# Altium PCB Noise Toaster.PcbDoc (part 1 of 2)
Units mil, origin at the board's own origin, x right, y up, seen from the top; angles counter-clockwise.
Board outline 1500 x 4200 mil, 2 copper layers (Top Layer, Bottom Layer), stack 30.756 mil thick; 110 components, 78 nets, 318 pads, 72 vias.
Unrouted connection lines stored in the file: 64.
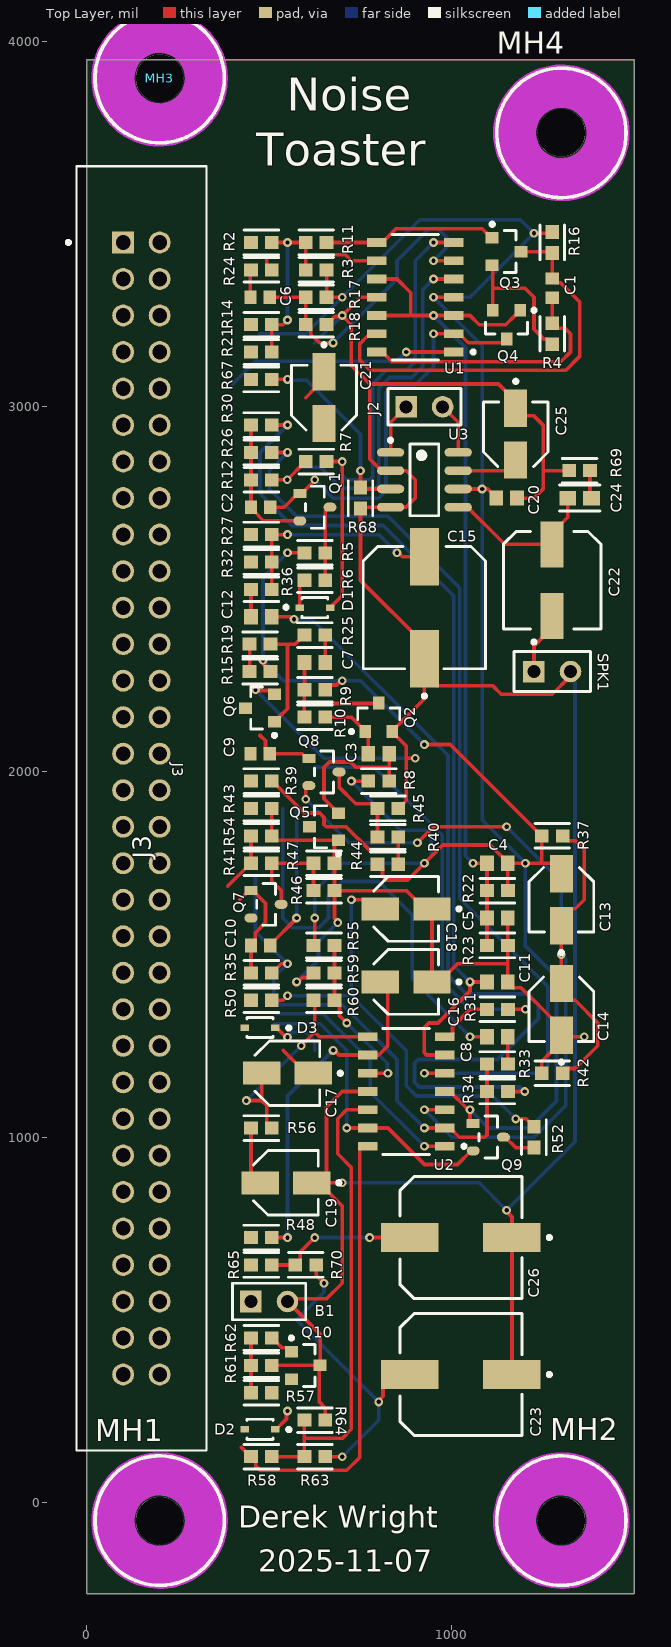
[diagram p0: Top Layer view]
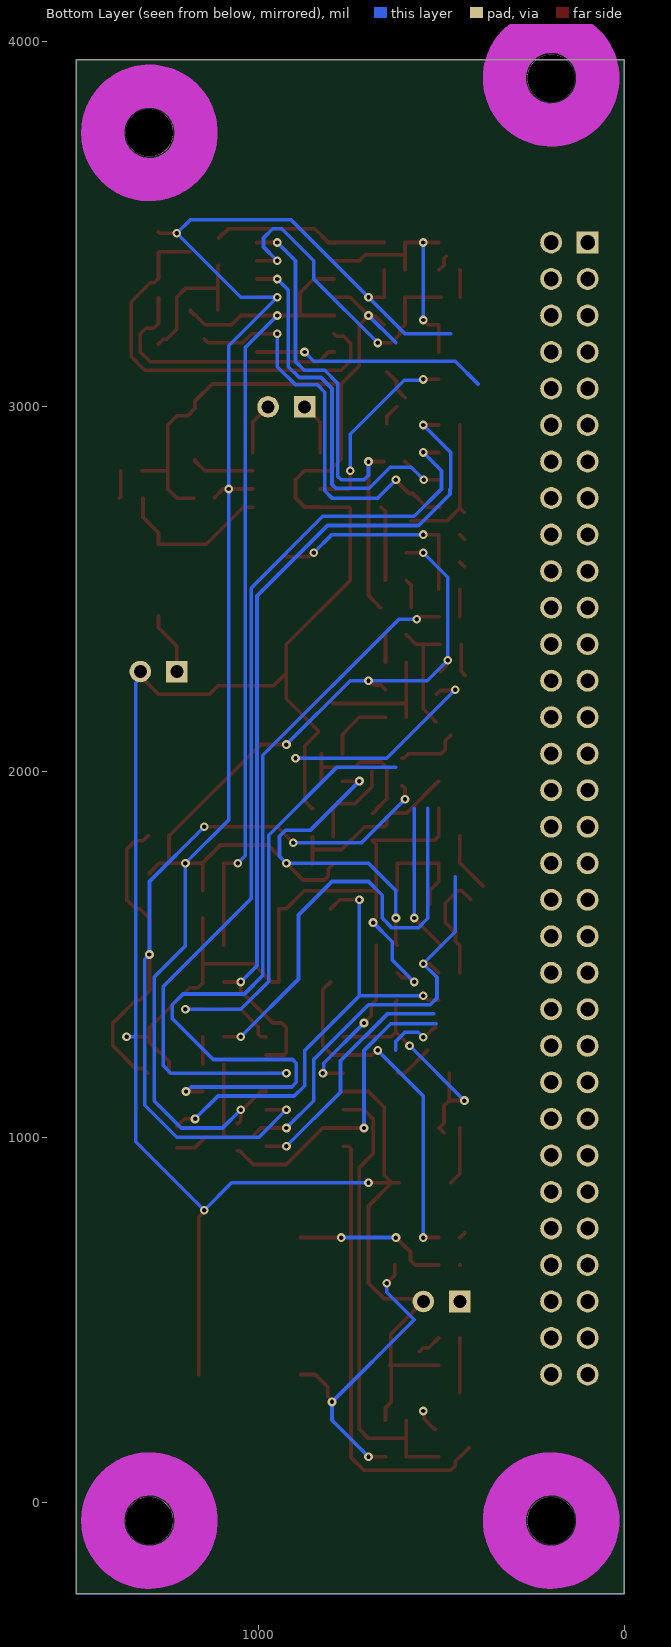
[diagram p1: Bottom Layer view, seen from below]
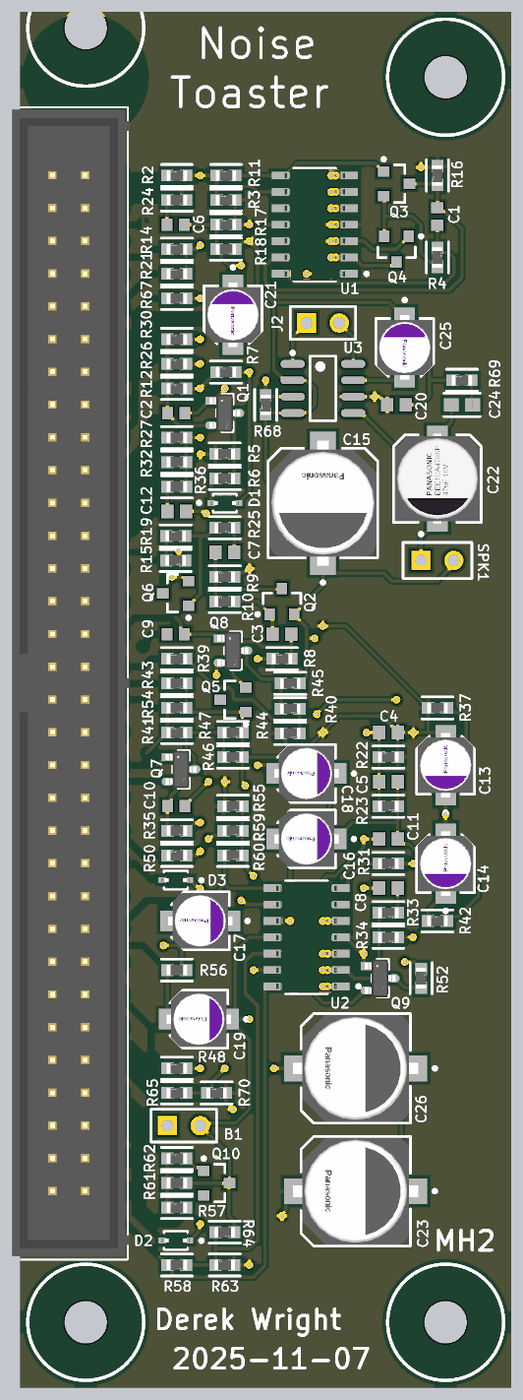
[diagram p2: 3D render of the assembled board from above, using the file's embedded part models]

## Layer stack, top to bottom
Top Solder: solder mask 1, SM-001, Dk 4
Top Layer: signal copper 1.378
Dielectric 1: core 28, Core-039, Dk 4.8
Bottom Layer: signal copper 1.378
Bottom Solder: solder mask 1, SM-001, Dk 4

## Board outline
0,-250 0,3950 1500,3950 1500,-250

## Design rules (kind name [scope] priority, off if disabled: settings)
Clearance [All] p1: gap=6 ignorepadtopadclearanceinfootprint=FALSE except(0: Arc-Hole Track-Hole SMDPad-Hole THPad-Hole Via-Hole Fill-Hole Poly-Hole Region-Hole Text-Hole; 10: SMDPad-SMDPad SMDPad-THPad SMDPad-Via SMDPad-Fill SMDPad-Poly SMDPad-Region SMDPad-Text THPad-THPad THPad-Via THPad-Fill THPad-Poly THPad-Region THPad-Text Via-Via Via-Fill Via-Poly Via-Region Via-Text Fill-Text Poly-Text Region-Text Text-Text)
HoleSize [All] p1: absolutevalues=TRUE maxlimit=200 minlimit=1 maxpercent=80.000 minpercent=20.000
MinimumSolderMaskSliver [All] p1: minsoldermaskwidth=6
PolygonConnect [All] p1: connectstyle=Relief reliefconductorwidth=10 reliefentries=4 polygonreliefangle="90 Angle" airgapwidth=10
RoutingVias [All] p1: holewidth=12 width=24 viastyle="Through Hole" minholewidth=12 minwidth=24 maxholewidth=12 maxwidth=24
SilkToSilkClearance [All] p1 off: silktosilkclearance=10
SilkToSolderMaskClearance [IsPad] p1 off: minsilkscreentomaskgap=10 clearancetoexposedcopper=TRUE
SolderMaskExpansion [All] p1: expansion=4 istentingtop=FALSE
SupplyNets "Schematic Supply Nets_2" [InNet('GND')] p1 off: voltage=0.000
SupplyNets "Schematic Supply Nets_1" [InNet('VCC')] p2: voltage=0.000
SupplyNets "Schematic Supply Nets" [InNet('VEE')] p3: voltage=0.000
Width "Schematic Width Constraint_3" [InNetClass('POWER')] p1: maxlimit=20 minlimit=10 preferedwidth=20 minimp=50.000000 maximp=50.000000 favimp=50.000000
Width [All] p2: maxlimit=20 minlimit=10 preferedwidth=10
26 further rules are at their usual default settings.

## Classes and differential pairs
component class "Noise Toaster": MH1 MH2 MH3 MH4
net class S11.[1..2]: S11.2 VCC
net class S10.[1..2]: S10.2 VCC
net class S9.[1..3]: R13.3 S7.1 S9.3
net class S8.[1..3]: S8.1 S8.2 S8.3
net class S7.[1..2]: LED1.2 S7.1
net class S6.[1..3]: R13.3 R38.3 S1.2
net class S4.[1..2]: S4.1 S4.2
net class S3.[1..3]: S3.1 S3.2 S3.3
net class S2.[1..2]: LED1.2 S2.1
net class S1.[1..2]: R20.3 S1.2
net class R66.[1..3]: R66.2 R66.3 VEE
net class R53.[1..3]: R51.1 R53.3
net class R51.[1..3]: R51.1 R51.3
net class R49.[1..3]: LED1.2 R49.3
net class R38.[1..3]: R38.1 R38.2 R38.3
net class R29.[1..3]: R28.1 R29.1
net class R28.[1..3]: GND R28.1
net class R20.[1..3]: GND R20.2 R20.3
net class R13.[1..3]: R13.2 R13.3 VEE
net class R1.[1..3]: R1.2 VCC VEE
net class LED1.[1..2]: LED1.1 LED1.2
net class J1.[1..3]: GND J1.1 J1.2
net class S5.[1..2]: R66.3 S5.2
component class "U_Front Panel Header": J3
net class POWER: GND VCC VEE
component class "U_White Noise": C3 C7 Q2 Q5 Q6 R8 R9 R10 R15 R19 R25
component class U_VCO: C1 C2 C4 C5 C6 C11 D1 Q1 Q3 Q4 R2 R3 R4 R5 R6 R7 R11 R12 R14 R16 R17 R18 R21 R22 R23 R24 R26 R30 R31 R32 U1
component class U_VCF: C8 C9 C10 C12 Q8 R27 R33 R34 R35 R36 R39 R40 R43 R44 R45 U2
component class U_VCA: Q7 R41 R46 R47
component class "U_Power Supply": B1 C13 C14 C15 C23 R37 R42
component class U_LFO: C16 C17 C19 C26 R48 R55 R56 R59 R60 R65 R70
component class "U_Audio Amplifier": C20 C21 C22 C24 C25 J2 R67 R68 R69 SPK1 U3
component class U_ADG: C18 D2 D3 Q9 Q10 R50 R52 R54 R57 R58 R61 R62 R63 R64

## Components (designator, comment, footprint, x,y, rotation, side; value= is the part's Value field where it differs from the comment)
B1 "" HDR1X2 450,550 r0 top
C1 "885012206077‎" CAPC1608X90X35NL10T15 1275,3325 r270 top
C2 "885012206083‎" CAPC1608X90X35NL10T15 476.57,2725 r180 top
C3 "CL10B104KB8NNNC" SAMS-C0603-2_M 800,2050 r180 top
C4 "CL10B104KB8NNNC" SAMS-C0603-2_M 1125,1750 r180 top
C5 "CL10B104KB8NNNC" SAMS-C0603-2_M 1125,1600 r0 top
C6 "885012206089" CAPC1608X90X35NL10T15 475,3300 r0 top
C7 "CL10B104KB8NNNC" SAMS-C0603-2_M 625,2300 r180 top
C8 "CL10B104KB8NNNC" SAMS-C0603-2_M 1125,1275 r0 top
C9 "885012206083‎" CAPC1608X90X35NL10T15 475,2050 r0 top
C10 "885012206083‎" CAPC1608X90X35NL10T15 476.57,1525 r180 top
C11 "CL10B104KB8NNNC" SAMS-C0603-2_M 1125,1425 r180 top
C12 "CL10B104KB8NNNC" SAMS-C0603-2_M 478.54,2425 r0 top
C13 "865080440002" FP-OS-CON-SMT-A5-MFG 1300,1650 r90 top
C14 "865080440002" FP-OS-CON-SMT-A5-MFG 1300,1350 r90 top
C15 "" FP-FTF-MFG 925,2450 r90 top
C16 "" FP-OS-CON-SMT-A5-MFG 875,1425 r180 top
C17 "EEE-1HA010NR" FP-OS-CON-SMT-A5-MFG 550,1175 r180 top
C18 "" FP-OS-CON-SMT-A5-MFG 875,1625 r180 top
C19 "" FP-OS-CON-SMT-A5-MFG 545.87,875 r180 top
C20 "CL10B104KB8NNNC" SAMS-C0603-2_M 1150,2750 r180 top
C21 "EEE-1HA010NR" FP-OS-CON-SMT-A5-MFG 650,3025 r270 top
C22 "" FP-SD-MFG 1275,2525 r90 top
C23 "" FP-FTF-MFG 1025,350 r180 top
C24 "CL10B473KB8NNNC" FP-CL10-IPC_A 1350,2750 r180 top
C25 "865080440002" FP-OS-CON-SMT-A5-MFG 1175,2925 r270 top
C26 "" FP-FTF-MFG 1025,725 r180 top
D1 "1N4448WS-7-F" FP-SOD323-MFG 625,2450 r0 top value=4pF
D2 "1N4448WS-7-F" FP-SOD323-MFG 475,200 r180 top value=4pF
D3 "1N4448WS-7-F" FP-SOD323-MFG 475,1300 r180 top value=4pF
J2 "Optional Gain" HDR1X2 875,3000 r0 top
J3 "61306421821" CONN_302-S641_OST 100,3450 r90 top
MH1 "Screw Hole (3mm, Unplated)" "SCREW HOLE (3MM, UNPLATED)" 200,-50 r0 top
MH2 "Screw Hole (3mm, Unplated)" "SCREW HOLE (3MM, UNPLATED)" 1300,-50 r0 top
MH3 "Screw Hole (3mm, Unplated)" "SCREW HOLE (3MM, UNPLATED)" 200,3900 r0 top
MH4 "Screw Hole (3mm, Unplated)" "SCREW HOLE (3MM, UNPLATED)" 1300,3750 r0 top
Q1 "MMBFJ113" FP-318BM-IPC_C 625,2725 r0 top
Q2 "MMBT3904LT1G" ONSC-SOT-23-3-318-08_V 800,2150 r90 top
Q3 "MMBT3904LT1G" ONSC-SOT-23-3-318-08_V 1150,3425 r0 top
Q4 "MMBT3904LT1G" ONSC-SOT-23-3-318-08_V 1150,3225 r270 top
Q5 "MMBT3904LT1G" ONSC-SOT-23-3-318-08_V 650,1850 r180 top
Q6 "MMBT3904LT1G" ONSC-SOT-23-3-318-08_V 475,2175 r180 top
Q7 "MMBFJ113" FP-318BM-IPC_C 491.34,1637.6 r0 top
Q8 "MMBFJ113" FP-318BM-IPC_C 650,2000 r0 top
Q9 "MMBFJ113" FP-318BM-IPC_C 1100,1000 r0 top
Q10 "MMBT3906LT1G" ONSC-SOT-23-3-318-08_V 600,375 r0 top
R2 "ESR03EZPJ753" FP-ESR03-IPC_B 478.62,3450 r0 top
R3 "ESR03EZPJ274" FP-ESR03-IPC_B 628.62,3375 r0 top
R4 "ESR03EZPJ103" FP-ESR03-IPC_B 1275,3200 r270 top
R5 "ESR03EZPJ205" FP-ESR03-IPC_B 625,2600 r180 top
R6 "ESR03EZPJ103" FP-ESR03-IPC_B 625,2525 r180 top
R7 "ESR03EZPJ304" FP-ESR03-IPC_B 628.62,2850 r0 top
R8 "ESR03EZPJ105" FP-ESR03-IPC_B 800,1975 r0 top
R9 "ESR03EZPJ103" FP-ESR03-IPC_B 625,2225 r0 top
R10 "ESR03EZPJ474" FP-ESR03-IPC_B 625,2150 r0 top
R11 "ESR03EZPJ202" FP-ESR03-IPC_B 628.62,3450 r0 top
R12 "ESR03EZPJ103" FP-ESR03-IPC_B 478.62,2800 r0 top
R14 "ESR03EZPJ104" FP-ESR03-IPC_B 478.62,3225 r0 top
R15 "ESR03EZPJ103" FP-ESR03-IPC_B 475,2275 r180 top
R16 "ESR03EZPJ205" FP-ESR03-IPC_B 1275,3450 r90 top
R17 "ESR03EZPJ103" FP-ESR03-IPC_B 628.62,3300 r0 top
R18 "ESR03EZPJ153" FP-ESR03-IPC_B 628.62,3225 r180 top
R19 "ESR03EZPJ474" FP-ESR03-IPC_B 475,2350 r0 top
R21 "ESR03EZPJ363" FP-ESR03-IPC_B 478.62,3150 r0 top
R22 "ESR03EZPJ472" FP-ESR03-IPC_B 1125,1675 r0 top
R23 "ESR03EZPJ472" FP-ESR03-IPC_B 1125,1525 r180 top
R24 "ESR03EZPJ104" FP-ESR03-IPC_B 478.62,3375 r180 top
R25 "ESR03EZPJ104" FP-ESR03-IPC_B 625,2375 r180 top
R26 "ESR03EZPJ103" FP-ESR03-IPC_B 478.62,2875 r0 top
R27 "ESR03EZPJ473" FP-ESR03-IPC_B 478.62,2650 r180 top
R30 "ESR03EZPJ205" FP-ESR03-IPC_B 478.62,2950 r0 top
R31 "ESR03EZPJ104" FP-ESR03-IPC_B 1125,1350 r180 top
R32 "ESR03EZPJ103" FP-ESR03-IPC_B 478.62,2575 r180 top
R33 "ESR03EZPJ475" FP-ESR03-IPC_B 1125,1200 r180 top
R34 "ESR03EZPJ305" FP-ESR03-IPC_B 1125,1125 r180 top
R35 "ESR03EZPJ475" FP-ESR03-IPC_B 478.62,1450 r180 top
R36 "ESR03EZPJ473" FP-ESR03-IPC_B 478.62,2500 r180 top
R37 "ESR03EZPJ472" FP-ESR03-IPC_B 1275,1825 r180 top
R39 "ESR03EZPJ393" FP-ESR03-IPC_B 478.62,1975 r0 top
R40 "ESR03EZPJ393" FP-ESR03-IPC_B 825,1822.2 r180 top
R41 "ESR03EZPJ474" FP-ESR03-IPC_B 478.62,1750 r0 top
R42 "ESR03EZPJ472" FP-ESR03-IPC_B 1275,1175 r0 top
R43 "ESR03EZPJ273" FP-ESR03-IPC_B 478.62,1900 r180 top
R44 "ESR03EZPJ104" FP-ESR03-IPC_B 825,1747.2 r180 top
R45 "ESR03EZPJ104" FP-ESR03-IPC_B 825,1900 r180 top
R46 "ESR03EZPJ105" FP-ESR03-IPC_B 650,1675 r180 top
R47 "ESR03EZPJ104" FP-ESR03-IPC_B 650,1750 r180 top
R48 "ESR03EZPJ302" FP-ESR03-IPC_B 478.62,725 r0 top
R50 "ESR03EZPJ821" FP-ESR03-IPC_B 478.62,1375 r0 top
R52 "ESR03EZPJ103" FP-ESR03-IPC_B 1225,1000 r270 top
R54 "ESR03EZPJ472" FP-ESR03-IPC_B 478.62,1825 r180 top
R55 "ESR03EZPJ104" FP-ESR03-IPC_B 650,1525 r180 top
R56 "ESR03EZPJ753" FP-ESR03-IPC_B 478.62,1025 r180 top
R57 "ESR03EZPJ201" FP-ESR03-IPC_B 478.62,300 r0 top
R58 "ESR03EZPJ104" FP-ESR03-IPC_B 478.62,125 r180 top
R59 "ESR03EZPJ104" FP-ESR03-IPC_B 650,1450 r180 top
R60 "ESR03EZPJ104" FP-ESR03-IPC_B 650,1375 r180 top
R61 "ESR03EZPJ103" FP-ESR03-IPC_B 478.62,375 r180 top
R62 "ESR03EZPJ103" FP-ESR03-IPC_B 478.62,450 r0 top
R63 "ESR03EZPJ154" FP-ESR03-IPC_B 625,125 r0 top
R64 "ESR03EZPJ154" FP-ESR03-IPC_B 625,225 r180 top
R65 "ESR03EZPJ302" FP-ESR03-IPC_B 478.62,650 r0 top
R67 "ESR03EZPJ104" FP-ESR03-IPC_B 478.62,3075 r180 top
R68 "ESR03EZPJ203" FP-ESR03-IPC_B 750,2750 r90 top
R69 "ESR03EZPJ100" FP-ESR03-IPC_B 1350,2825 r0 top
R70 "ESR03EZPJ302" FP-ESR03-IPC_B 600,650 r0 top
SPK1 "Speaker" PIN2 1225,2275 r0 top
U1 "LM324DT" FP-SO-14-MFG 900,3300 r180 top
U2 "LM324DT" FP-SO-14-MFG 875,1125 r180 top
U3 "LM386MX-1/NOPB" TI-D8_L 925,2800 r0 top

## Footprints (in the part's own frame and the unit in brackets; to place one, negate y for a bottom-side part, rotate by r counter-clockwise, add the part's x,y. Pads: shape width x height; smd on the part's side, far side on the other; paste and mask are expansions set on the pad)
CAPC1608X90X35NL10T15 [mm] "Chip Capacitor, 2-Leads, Body 1.60x0.80mm, IPC Medium Density"
  rect 0.85x0.95 smd: 1(-0.675,0) 2(0.675,0)
  body extent -0.85,-0.45 0.85,0.45, height 0.9
CONN_302-S641_OST [mil]
  rect 60x60 hole 40 paste-99999: 1(0,0)
  round 60 hole 40 paste-99999: 2(0,-100) 3(-100,0) 4(-100,-100) 5(-200,0) 6(-200,-100) 7(-300,0) 8(-300,-100) 9(-400,0) 10(-400,-100) 11(-500,0) 12(-500,-100) 13(-600,0) 14(-600,-100) 15(-700,0) 16(-700,-100) 17(-800,0) 18(-800,-100) 19(-900,0) 20(-900,-100) 21(-1000,0) 22(-1000,-100) 23(-1100,0) 24(-1100,-100) 25(-1200,0) 26(-1200,-100) 27(-1300,0) 28(-1300,-100) 29(-1400,0) 30(-1400,-100) 31(-1500,0) 32(-1500,-100) 33(-1600,0) 34(-1600,-100) 35(-1700,0) 36(-1700,-100) 37(-1800,0) 38(-1800,-100) 39(-1900,0) 40(-1900,-100) 41(-2000,0) 42(-2000,-100) 43(-2100,0) 44(-2100,-100) 45(-2200,0) 46(-2200,-100) 47(-2300,0) 48(-2300,-100) 49(-2400,0) 50(-2400,-100) 51(-2500,0) 52(-2500,-100) 53(-2600,0) 54(-2600,-100) 55(-2700,0) 56(-2700,-100) 57(-2800,0) 58(-2800,-100) 59(-2900,0) 60(-2900,-100) 61(-3000,0) 62(-3000,-100) 63(-3100,0) 64(-3100,-100)
  silkscreen extent -3308,-228 208,155, body extent -3299,-233 201,125, height 358
FP-318BM-IPC_C [mm]
  rect 0.904x0.631 smd paste+0 mask+0: 1(-1.05,0.95)
  rrect100% 0.904x0.631 smd paste+0 mask+0: 2(-1.05,-0.95) 3(1.05,0)
  silkscreen extent -0.65,-1.46 0.65,1.46, body extent -1.6,-1.56 1.6,1.56, height 0.25
FP-CL10-IPC_A [mil]
  rect 45.6x39.85 smd paste+0 mask+0: 1(-32.56,0) 2(32.56,0)
  silkscreen extent -55,-36 55,36, body extent -75,-40 75,40, height 10
FP-ESR03-IPC_B [mil]
  rect 37.72x35.91 smd paste+0 mask+0: 1(-28.62,0) 2(28.62,0)
  silkscreen extent -47,-34 47,34, body extent -57,-28 57,28, height 10
FP-FTF-MFG [mm]
  rect 4x2 smd paste+0 mask+0: 1(-3.55,0) 2(3.55,0)
  silkscreen extent -6.27,-4.25 4.25,4.25, body extent -5.8,-4.5 5.8,4.5, height 0.25
FP-OS-CON-SMT-A5-MFG [mm]
  rect 2.6x1.6 smd paste+0 mask+0: 1(-1.8,0) 2(1.8,0)
  silkscreen extent -3.8,-2.25 2.25,2.25, body extent -3.35,-2.5 3.35,2.5, height 0.25
FP-SD-MFG [mm]
  rect 3.2x1.6 smd paste+0 mask+0: 1(-2.5,0) 2(2.5,0)
  silkscreen extent -3.4,-3.4 3.4,3.4, body extent -4.35,-3.65 4.35,3.65, height 0.25
FP-SO-14-MFG [mm]
  rect 1.35x0.6 smd paste+0 mask+0: 1(-2.675,3.81) 2(-2.675,2.54) 3(-2.675,1.27) 4(-2.675,0) 5(-2.675,-1.27) 6(-2.675,-2.54) 7(-2.675,-3.81) 8(2.675,-3.81) 9(2.675,-2.54) 10(2.675,-1.27) 11(2.675,0) 12(2.675,1.27) 13(2.675,2.54) 14(2.675,3.81)
  silkscreen extent -4.15,-4.37 1.62,4.37, body extent -3.45,-4.47 3.45,4.47, height 0.25
FP-SOD323-MFG [mm]
  rect 0.59x0.45 smd paste+0 mask+0: 1(-1.055,0) 2(1.055,0)
  silkscreen extent -2.12,-0.7 0.9,0.7, body extent -1.45,-0.8 1.45,0.8, height 0.25
HDR1X2 [mm] "Connector; Header; 2 Position"
  rect 1.5x1.5 hole 0.9: 1(0,0)
  round 1.5 hole 0.9: 2(2.54,0)
  silkscreen extent -1.27,-1.27 3.81,1.27
ONSC-SOT-23-3-318-08_V [mm] "SOT23, 3-Leads, Body 2.92x1.3mm, Pitch 0.95mm"
  rect 0.9x0.8 smd: 1(-1,0.95) 2(-1,-0.95) 3(1,0)
  silkscreen extent -1.12,-1.46 0.65,2.02, body extent -0.65,-1.46 0.65,1.46, height 1.11
PIN2 [mm] "Photosensitive Diode; 2 Leads"
  rect 1.5x1.5 hole 0.9: 1(0,0)
  round 1.5 hole 0.9: 2(2.54,0)
  silkscreen extent -1.4,-1.4 3.94,2.17
SAMS-C0603-2_M [mm] "Chip Capacitor, 2-Leads, Body 1.70x0.90mm, IPC Low Density"
  rect 0.95x1.05 smd: 1(-0.725,0) 2(0.725,0)
  body extent -0.85,-0.45 0.85,0.45, height 0.9
"SCREW HOLE (3MM, UNPLATED)" [mil]
  round 130 hole 130 unplated: 1(0,0)
  Top Layer keep-out circle w118.11: c0,0 r127.95
  Bottom Layer keep-out circle w118.11: c0,0 r127.95
  Keep-Out Layer circle w118.11: c0,0 r127.95
  silkscreen extent -177,-177 177,177
TI-D8_L [mm] "SOIC, 8-Leads, Body 5x4mm, Pitch 1.27mm, IPC High Density"
  oval 1.9x0.6 smd: 1(-2.35,1.905) 2(-2.35,0.635) 3(-2.35,-0.635) 4(-2.35,-1.905) 5(2.35,-1.905) 6(2.35,-0.635) 7(2.35,0.635) 8(2.35,1.905)
  silkscreen extent -2.47,-2.5 1,2.88, body extent -2,-2.5 2,2.5, height 1.75

## Part data
B1: library part CMP-00622-2, "Hldr, Battery, PP3 (6R61), Phospher Bronze, Tin, Panel Mount, 1, Solder Lug", Flammability Rating="UL94 V-0", Manufacturer=Bulgin, Manufacturer Part Number=BX0023, Max Operating Temperature=70°C, Min Operating Temperature=-30°C, Package Quantity=50, Body Material=Nylon,Glass,Bronze, Category="Batteries and Accessories", ComponentLink1Description=https://datasheet.ciiva.com/1390/bulgin-2010-p9-1390970.pdf?src-supplier=Element14, ComponentLink1URL=https://datasheet.ciiva.com/1390/bulgin-2010-p9-1390970.pdf?src-supplier=Element14, ComponentLink2Description=https://datasheet.ciiva.com/11714/0900766b80d05969-11714722.pdf?src-supplier=RSComponents, ComponentLink2URL=https://datasheet.ciiva.com/11714/0900766b80d05969-11714722.pdf?src-supplier=RSComponents, ComponentLink3Description=https://datasheet.ciiva.com/3/battholders-2010-3898.pdf?src-supplier=Digi-Key, ComponentLink3URL=https://datasheet.ciiva.com/3/battholders-2010-3898.pdf?src-supplier=Digi-Key, ComponentLink4Description=https://datasheet.ciiva.com/3353/06951396-3353149.pdf?src-supplier=Distrelec, ComponentLink4URL=https://datasheet.ciiva.com/3353/06951396-3353149.pdf?src-supplier=Distrelec, ComponentLink5Description=https://datasheet.ciiva.com/25759/70099004-25759926.pdf?src-supplier=Allied+Electronics, ComponentLink5URL=https://datasheet.ciiva.com/25759/70099004-25759926.pdf?src-supplier=Allied+Electronics, ComponentLink6Description=https://datasheet.ciiva.com/24336/battholders2005-24336774.pdf?src-supplier=Onlinecomponents.com, ComponentLink6URL=https://datasheet.ciiva.com/24336/battholders2005-24336774.pdf?src-supplier=Onlinecomponents.com, Contact Material=Bronze,Tin, Contact Plating=Tin, Material=Nylon,Glass, Mount=Panel,Screw, Number of Batteries=1, Number of Cells=1, Packaging=Bulk, Pricing 1="1=11.73100, 10=9.42900, 50=8.50000, 100=7.93600, 250=7.25000, 500=6.86300, 1000=6.28900 (USD)", REACH SVHC="No SVHC", RoHS=Yes, RoHS Compliant=Yes, Series=BX, Stock 1=80, Supplier 1="Arrow Electronics", Supplier Part Number 1=BX0023, Termination=Solder
C1: library part CMP-2006-02891-1, Capacitance=100pF, Case Code (Imperial)=0603, Case Code (Metric)=1608, Dielectric=X7R, Manufacturer=Wurth, Manufacturer Part Number=885012206083, Max Operating Temperature=125°C, Min Operating Temperature=-55°C, Part Number=885012206083‎, Supplier Part Number 1=8392938, Tolerance=10%, Voltage Rating=50V, Case/Package=0603, Category="Ceramic Capacitors", ComponentLink1Description=http://www.farnell.com/datasheets/1958479.pdf?src-supplier=Farnell, ComponentLink1URL=http://www.farnell.com/datasheets/1958479.pdf?src-supplier=Farnell, ComponentLink2Description=http://www.farnell.com/datasheets/1958479.pdf?src-supplier=Element14, ComponentLink2URL=http://www.farnell.com/datasheets/1958479.pdf?src-supplier=Element14, ComponentLink3Description=https://katalog.we-online.de/pbs/datasheet/885012206083.pdf?src-supplier=Digi-Key, ComponentLink3URL=https://katalog.we-online.de/pbs/datasheet/885012206083.pdf?src-supplier=Digi-Key, ComponentLink4Description=http://www.farnell.com/datasheets/1958479.pdf?src-supplier=Newark, ComponentLink4URL=http://www.farnell.com/datasheets/1958479.pdf?src-supplier=Newark, ComponentLink5Description=http://www.farnell.com/datasheets/1958478.pdf?src-supplier=Farnell, ComponentLink5URL=http://www.farnell.com/datasheets/1958478.pdf?src-supplier=Farnell, ComponentLink6Description=http://www.farnell.com/datasheets/1958478.pdf?src-supplier=Element14, ComponentLink6URL=http://www.farnell.com/datasheets/1958478.pdf?src-supplier=Element14, ComponentLink7Description=https://katalog.we-online.de/pbs/datasheet/885012206077.pdf?src-supplier=Digi-Key, ComponentLink7URL=https://katalog.we-online.de/pbs/datasheet/885012206077.pdf?src-supplier=Digi-Key, ComponentLink8Description=http://www.farnell.com/datasheets/1958478.pdf?src-supplier=Newark, ComponentLink8URL=http://www.farnell.com/datasheets/1958478.pdf?src-supplier=Newark, Length=0.063inch, Mount="Surface Mount", Packaging="Cut Tape", Pricing 1="100=0.02300, 500=0.02000, 2000=0.01800, 4000=0.01600, 8000=0.00900 (USD)", Pricing 2="100=0.02600, 500=0.01800, 2000=0.01600, 4000=0.01000, 8000=0.01000 (USD)", REACH SVHC=Unknown, RoHS=Yes, RoHS Compliant=Yes, Stock 1=1, Stock 2=1, Supplier 1=RSComponents, Supplier 2=RSComponents, Supplier Part Number 2=8392916, Thickness=0.037inch, Voltage Rating (DC)=50V, Width=0.031inch
C2 C9 C10: library part CMP-2006-02891-1, Capacitance=1nF, Case Code (Imperial)=0603, Case Code (Metric)=1608, Dielectric=X7R, Manufacturer=Wurth, Manufacturer Part Number=885012206083, Max Operating Temperature=125°C, Min Operating Temperature=-55°C, Supplier Part Number 1=8392938, Tolerance=10%, Voltage Rating=50V, Case/Package=0603, Category="Ceramic Capacitors", ComponentLink1Description=http://www.farnell.com/datasheets/1958479.pdf?src-supplier=Farnell, ComponentLink1URL=http://www.farnell.com/datasheets/1958479.pdf?src-supplier=Farnell, ComponentLink2Description=http://www.farnell.com/datasheets/1958479.pdf?src-supplier=Element14, ComponentLink2URL=http://www.farnell.com/datasheets/1958479.pdf?src-supplier=Element14, ComponentLink3Description=https://katalog.we-online.de/pbs/datasheet/885012206083.pdf?src-supplier=Digi-Key, ComponentLink3URL=https://katalog.we-online.de/pbs/datasheet/885012206083.pdf?src-supplier=Digi-Key, ComponentLink4Description=http://www.farnell.com/datasheets/1958479.pdf?src-supplier=Newark, ComponentLink4URL=http://www.farnell.com/datasheets/1958479.pdf?src-supplier=Newark, Length=0.063inch, Mount="Surface Mount", Packaging="Cut Tape", Part Number=885012206083‎, Pricing 1="100=0.02300, 500=0.02000, 2000=0.01800, 4000=0.01600, 8000=0.00900 (USD)", REACH SVHC=Unknown, RoHS=Yes, RoHS Compliant=Yes, Stock 1=1, Supplier 1=RSComponents, Thickness=0.037inch, Voltage Rating (DC)=50V, Width=0.031inch
C3 C4 C5 C7 C8 C11 C12 C20: library part CMP-2000-05332-1, "Multi-layer Ceramic Capacitor, -55 to 125 degC, 2-Pin SMD (0603), RoHS, Tape and Reel", Capacitance=0.1µF, Case Size/Dimension=0603, Dielectric=X7R, Manufacturer="Samsung Electro-Mechanics", Rated Voltage=50V, Tolerance (%)=±10%, Datasheet URL=https://datasheet.ciiva.com/29198/456651-da-01-en-vs-kondensator-0605-29198839.pdf, Datasheet Version=Nov-10, Manufacturer URL=http://www.samsungsem.com/global/index.jsp
C6: library part CMP-2006-02891-1, Capacitance=10nF, Case Code (Imperial)=0603, Case Code (Metric)=1608, Dielectric=X7R, Manufacturer="Wurth Electronics", Max Operating Temperature=125°C, Min Operating Temperature=-55°C, Supplier Part Number 1=8392950, Tolerance=10%, Voltage Rating=50V, Case/Package=0603, Category="Ceramic Capacitors", ComponentLink1Description=http://www.farnell.com/datasheets/1958479.pdf?src-supplier=Farnell, ComponentLink1URL=http://www.farnell.com/datasheets/1958479.pdf?src-supplier=Farnell, ComponentLink2Description=http://www.farnell.com/datasheets/1958479.pdf?src-supplier=Element14, ComponentLink2URL=http://www.farnell.com/datasheets/1958479.pdf?src-supplier=Element14, ComponentLink3Description=https://katalog.we-online.de/pbs/datasheet/885012206083.pdf?src-supplier=Digi-Key, ComponentLink3URL=https://katalog.we-online.de/pbs/datasheet/885012206083.pdf?src-supplier=Digi-Key, ComponentLink4Description=http://www.farnell.com/datasheets/1958479.pdf?src-supplier=Newark, ComponentLink4URL=http://www.farnell.com/datasheets/1958479.pdf?src-supplier=Newark, ComponentLink5Description=http://www.farnell.com/datasheets/1958478.pdf?src-supplier=Farnell, ComponentLink5URL=http://www.farnell.com/datasheets/1958478.pdf?src-supplier=Farnell, ComponentLink6Description=http://www.farnell.com/datasheets/1958478.pdf?src-supplier=Element14, ComponentLink6URL=http://www.farnell.com/datasheets/1958478.pdf?src-supplier=Element14, ComponentLink7Description=https://katalog.we-online.de/pbs/datasheet/885012206077.pdf?src-supplier=Digi-Key, ComponentLink7URL=https://katalog.we-online.de/pbs/datasheet/885012206077.pdf?src-supplier=Digi-Key, ComponentLink8Description=http://www.farnell.com/datasheets/1958478.pdf?src-supplier=Newark, ComponentLink8URL=http://www.farnell.com/datasheets/1958478.pdf?src-supplier=Newark, ComponentLink9Description=http://www.farnell.com/datasheets/1958483.pdf?src-supplier=Farnell, ComponentLink9URL=http://www.farnell.com/datasheets/1958483.pdf?src-supplier=Farnell, ComponentLink10Description=http://www.farnell.com/datasheets/1958483.pdf?src-supplier=Element14, ComponentLink10URL=http://www.farnell.com/datasheets/1958483.pdf?src-supplier=Element14, ComponentLink11Description=https://katalog.we-online.de/pbs/datasheet/885012206089.pdf?src-supplier=Digi-Key, ComponentLink11URL=https://katalog.we-online.de/pbs/datasheet/885012206089.pdf?src-supplier=Digi-Key, ComponentLink12Description=http://www.farnell.com/datasheets/1958483.pdf?src-supplier=Newark, ComponentLink12URL=http://www.farnell.com/datasheets/1958483.pdf?src-supplier=Newark, Length=0.063inch, Manufacturer Part Number=885012206089, Mount="Surface Mount", Packaging="Cut Tape", Pricing 1="100=0.02100, 500=0.02000, 1000=0.01800, 2500=0.01800, 5000=0.01500 (USD)", REACH SVHC=Unknown, RoHS=Yes, RoHS Compliant=Yes, Stock 1=1, Supplier 1=RSComponents, Thickness=0.037inch, Voltage Rating (DC)=50V, Width=0.031inch
C13 C14 C25: library part CMP-05427-000158-1, "CAP ALUM POLY 10UF 20% 10V SMD", Capacitance=10uF, Case/Package=Radial, Manufacturer="Wurth Electronics", Max Operating Temperature=105°C, Min Operating Temperature=-55°C, Package Quantity=2000, Ripple Current=85mA, Supplier Part Number 1=8391799P, Tolerance=20%, Voltage Rating=25V, Category="Aluminum Electrolytic Capacitors", ComponentLink1Description=http://www.farnell.com/datasheets/1880137.pdf?src-supplier=Farnell, ComponentLink1URL=http://www.farnell.com/datasheets/1880137.pdf?src-supplier=Farnell, ComponentLink2Description=http://www.farnell.com/datasheets/1880137.pdf?src-supplier=Element14, ComponentLink2URL=http://www.farnell.com/datasheets/1880137.pdf?src-supplier=Element14, ComponentLink3Description=https://katalog.we-online.de/pbs/datasheet/865080440002.pdf?src-supplier=Digi-Key, ComponentLink3URL=https://katalog.we-online.de/pbs/datasheet/865080440002.pdf?src-supplier=Digi-Key, ComponentLink4Description=http://katalog.we-online.de/pbs/datasheet/865080440002.pdf?src-supplier=Digi-Key, ComponentLink4URL=http://katalog.we-online.de/pbs/datasheet/865080440002.pdf?src-supplier=Digi-Key, Diameter=4mm, Height=5.5mm, Height - Seated (Max)=0.217inch, Impedance=2.1R, Life (Hours)=2000Hour, Manufacturer Part Number=865080440002, Mount="Surface Mount", Packaging="Cut Tape", Polarity=Polar, Pricing 1="25=0.18500, 125=0.12700, 250=0.11600, 500=0.10400 (USD)", REACH SVHC=Unknown, Ripple Current (AC)=85mA, RoHS=Yes, RoHS Compliant=Yes, Stock 1=1, Supplier 1=RSComponents, Voltage Rating (DC)=25V
C15 C23 C26: library part CMP-05427-000040-1, Capacitance=470uF, Case/Package=Radial, Manufacturer="Wurth Electronics", Manufacturer Part Number=865080353015, Max Operating Temperature=105°C, Min Operating Temperature=-55°C, Package Quantity=500, Ripple Current=590mA, Supplier Part Number 1=732-8425-1-ND, Tolerance=20%, Voltage Rating=16V, Category="Aluminum Electrolytic Capacitors", ComponentLink1Description=http://www.farnell.com/datasheets/1880132.pdf?src-supplier=Farnell, ComponentLink1URL=http://www.farnell.com/datasheets/1880132.pdf?src-supplier=Farnell, ComponentLink2Description=http://www.farnell.com/datasheets/1880132.pdf?src-supplier=Element14, ComponentLink2URL=http://www.farnell.com/datasheets/1880132.pdf?src-supplier=Element14, ComponentLink3Description=https://katalog.we-online.de/pbs/datasheet/865080353015.pdf?src-supplier=Digi-Key, ComponentLink3URL=https://katalog.we-online.de/pbs/datasheet/865080353015.pdf?src-supplier=Digi-Key, ComponentLink4Description=http://katalog.we-online.de/pbs/datasheet/865080353015.pdf?src-supplier=Digi-Key, ComponentLink4URL=http://katalog.we-online.de/pbs/datasheet/865080353015.pdf?src-supplier=Digi-Key, Diameter=8mm, Height=10.5mm, Height - Seated (Max)=0.413inch, Impedance=220mR, Life (Hours)=2000Hour, Mount="Surface Mount", Packaging="Cut Tape", Polarity=Polar, Pricing 1="1=0.63000, 50=0.53700, 100=0.46700, 250=0.41600 (USD)", REACH SVHC=Unknown, Ripple Current (AC)=590mA, RoHS=Yes, RoHS Compliant=Yes, Stock 1=263, Supplier 1=Digi-Key, Voltage Rating (DC)=16V
C16 C19: library part CMP-05427-000158-1, Capacitance=1uF, Case/Package=Radial, Manufacturer="Wurth Electronics", Manufacturer Part Number=865060640001, Max Operating Temperature=105°C, Min Operating Temperature=-55°C, Package Quantity=2000, Ripple Current=60mA, Supplier Part Number 1=8395602, Tolerance=20%, Voltage Rating=50V, Category="Aluminum Electrolytic Capacitors", ComponentLink1Description=http://www.farnell.com/datasheets/1880069.pdf?src-supplier=Farnell, ComponentLink1URL=http://www.farnell.com/datasheets/1880069.pdf?src-supplier=Farnell, ComponentLink2Description=http://www.farnell.com/datasheets/1880069.pdf?src-supplier=Element14, ComponentLink2URL=http://www.farnell.com/datasheets/1880069.pdf?src-supplier=Element14, ComponentLink3Description=http://www.farnell.com/datasheets/1880069.pdf?src-supplier=Newark, ComponentLink3URL=http://www.farnell.com/datasheets/1880069.pdf?src-supplier=Newark, ComponentLink4Description=http://katalog.we-online.de/pbs/datasheet/865060640001.pdf?src-supplier=Digi-Key, ComponentLink4URL=http://katalog.we-online.de/pbs/datasheet/865060640001.pdf?src-supplier=Digi-Key, ComponentLink5Description=https://katalog.we-online.de/pbs/datasheet/865060640001.pdf?src-supplier=Digi-Key, ComponentLink5URL=https://katalog.we-online.de/pbs/datasheet/865060640001.pdf?src-supplier=Digi-Key, Diameter=4mm, Height=5.5mm, Height - Seated (Max)=0.217inch, Impedance=2.9R, Life (Hours)=2000Hour, Mount="Surface Mount", Packaging="Cut Tape", Polarity=Polar, Pricing 1="25=0.16200, 125=0.11600, 250=0.10400, 500=0.09300 (USD)", REACH SVHC=Unknown, Ripple Current (AC)=60mA, RoHS=Yes, Stock 1=1, Supplier 1=RSComponents, Voltage Rating (DC)=50V
C17: library part CMP-05427-000158-1, "CAP ALUM POLY 10UF 20% 10V SMD", Capacitance=1uF, Case/Package=Radial, Manufacturer=Panasonic, Max Operating Temperature=85°C, Min Operating Temperature=-40°C, Package Quantity=1, Ripple Current=10mA, Supplier Part Number 1=667-EEE-1HA010NR, Tolerance=20%, Voltage Rating=50V, Category="Aluminum Electrolytic Capacitors", ComponentLink1Description=https://datasheet.ciiva.com/24228/aba0000ce2-40801-24228231.pdf?src-supplier=Mouser, ComponentLink1URL=https://datasheet.ciiva.com/24228/aba0000ce2-40801-24228231.pdf?src-supplier=Mouser, ComponentLink2Description=https://datasheet.ciiva.com/14604/70255710-14604079.pdf?src-supplier=Allied+Electronics, ComponentLink2URL=https://datasheet.ciiva.com/14604/70255710-14604079.pdf?src-supplier=Allied+Electronics, ComponentLink3Description=https://datasheet.ciiva.com/14597/70255710-14597097.pdf?src-supplier=Allied+Electronics, ComponentLink3URL=https://datasheet.ciiva.com/14597/70255710-14597097.pdf?src-supplier=Allied+Electronics, ComponentLink4Description=https://datasheet.ciiva.com/16396/aba0000ce2-16396566.pdf?src-supplier=Future+Electronics, ComponentLink4URL=https://datasheet.ciiva.com/16396/aba0000ce2-16396566.pdf?src-supplier=Future+Electronics, ComponentLink5Description=https://datasheet.ciiva.com/30244/11aba0000ce2-30244199.pdf?src-supplier=Onlinecomponents.com, ComponentLink5URL=https://datasheet.ciiva.com/30244/11aba0000ce2-30244199.pdf?src-supplier=Onlinecomponents.com, Construction=Cylindrical, Contact Plating=Tin, Diameter=4mm, Height=5.4mm, Height - Seated (Max)=0.213inch, Lead Free="Lead Free", Length=5.5mm, Life (Hours)=2000Hour, Manufacturer Part Number=EEE-1HA010NR, Mount="Surface Mount,PCB", Packaging="Tape and Reel", Pricing 1="1=0.50000, 10=0.34500, 50=0.24200, 100=0.20700, 1000=0.15300, 10000=0.12100 (USD)", Radiation Hardening=No, REACH SVHC=Unknown, Ripple Current (AC)=10mA, RoHS=Yes, RoHS Compliant=Yes, Series=S, Stock 1=556, Supplier 1=Mouser, Termination=SMD/SMT, Voltage Rating (DC)=50V, Width=650um
C18: library part CMP-05427-000158-1, Capacitance=4.7uF, Case/Package=Radial, Manufacturer="Wurth Electronics", Manufacturer Part Number=865080640004, Max Operating Temperature=105°C, Min Operating Temperature=-55°C, Package Quantity=1, Ripple Current=55mA, Supplier Part Number 1=8391865, Tolerance=20%, Voltage Rating=50V, Category="Aluminum Electrolytic Capacitors", ComponentLink1Description=https://datasheet.ciiva.com/48693/001280472-da-01-en-wcap-asli-alu-elec-caps-865080640004-48693547.pdf?src-supplier=Conrad, ComponentLink1URL=https://datasheet.ciiva.com/48693/001280472-da-01-en-wcap-asli-alu-elec-caps-865080640004-48693547.pdf?src-supplier=Conrad, Diameter=4mm, Height=5.5mm, Height - Seated (Max)=0.217inch, Impedance=4.5R, Life (Hours)=2000Hour, Material=Aluminium, Mount="Surface Mount", Packaging="Cut Tape", Polarity=Polar, Pricing 1="25=0.18500, 125=0.12700, 250=0.11600, 500=0.10400, 2500=0.09800 (USD)", REACH SVHC=Unknown, Ripple Current (AC)=55mA, RoHS=Yes, RoHS Compliant=Yes, Stock 1=1, Supplier 1=RSComponents, Voltage Rating (DC)=50V
C21: library part CMP-05427-000158-1, "CAP ALUM POLY 10UF 20% 10V SMD", Capacitance=1uF, Case/Package=Radial, ESR (Equivalent Series Resistance)=220mR, Leakage Current=50uA, Manufacturer=Panasonic, Max Operating Temperature=105°C, Min Operating Temperature=-55°C, Package Quantity=2000, Ripple Current=700mA, Supplier Part Number 1=667-EEE-1HA010NR, Tolerance=20%, Voltage=10V, Voltage Rating=50V, Category="Aluminum Electrolytic Capacitors", ComponentLink1Description=https://datasheet.ciiva.com/24228/aba0000ce2-40801-24228231.pdf?src-supplier=Mouser, ComponentLink1URL=https://datasheet.ciiva.com/24228/aba0000ce2-40801-24228231.pdf?src-supplier=Mouser, ComponentLink2Description=https://datasheet.ciiva.com/14604/70255710-14604079.pdf?src-supplier=Allied+Electronics, ComponentLink2URL=https://datasheet.ciiva.com/14604/70255710-14604079.pdf?src-supplier=Allied+Electronics, ComponentLink3Description=https://datasheet.ciiva.com/14597/70255710-14597097.pdf?src-supplier=Allied+Electronics, ComponentLink3URL=https://datasheet.ciiva.com/14597/70255710-14597097.pdf?src-supplier=Allied+Electronics, ComponentLink4Description=https://datasheet.ciiva.com/16396/aba0000ce2-16396566.pdf?src-supplier=Future+Electronics, ComponentLink4URL=https://datasheet.ciiva.com/16396/aba0000ce2-16396566.pdf?src-supplier=Future+Electronics, ComponentLink5Description=https://datasheet.ciiva.com/30244/11aba0000ce2-30244199.pdf?src-supplier=Onlinecomponents.com, ComponentLink5URL=https://datasheet.ciiva.com/30244/11aba0000ce2-30244199.pdf?src-supplier=Onlinecomponents.com, Construction=Cylindrical, Contact Plating=Tin, Diameter=4mm, Dissipation Factor=10%, Height=5.4mm, Height - Seated (Max)=0.217inch, Lead Free="Lead Free", Length=5.4mm, Life (Hours)=2000Hour, Manufacturer Part Number=EEE-1HA010NR, Material=Polymer, Mount="Surface Mount", Number of Pins=5, Packaging="Tape and Reel", Polarity=Polar, Pricing 1="1=0.49000, 10=0.33900, 50=0.23700, 100=0.20300, 1000=0.15300, 10000=0.12100 (USD)", Radiation Hardening=No, REACH SVHC="No SVHC", Ripple Current (AC)=700mA, RoHS=Yes, RoHS Compliant=Yes, Series="OS-CON™, SVP", Stock 1=106, Supplier 1=Mouser, Termination=SMD/SMT, Voltage Rating (DC)=10V, Width=650um
C22: library part CMP-05427-000006-1, Capacitance=220uF, Case/Package=Radial, Dielectric Material=Aluminium, ESR (Equivalent Series Resistance)=160mR, Leakage Current=3uA, Manufacturer=Nichicon, Manufacturer Part Number=UCL1C221MCL1GS, Max Operating Temperature=105°C, Min Operating Temperature=-55°C, Package Quantity=1, Ripple Current=600mA, Tolerance=20%, Voltage Rating=16V, Category="Aluminum Electrolytic Capacitors", ComponentLink1Description=https://datasheet.ciiva.com/101/e-cl-101761.pdf?src-supplier=Digi-Key, ComponentLink1URL=https://datasheet.ciiva.com/101/e-cl-101761.pdf?src-supplier=Digi-Key, ComponentLink2Description=https://datasheet.ciiva.com/101/e-cl-101762.pdf?src-supplier=Digi-Key, ComponentLink2URL=https://datasheet.ciiva.com/101/e-cl-101762.pdf?src-supplier=Digi-Key, ComponentLink3Description=https://datasheet.ciiva.com/101/e-cl-101763.pdf?src-supplier=Digi-Key, ComponentLink3URL=https://datasheet.ciiva.com/101/e-cl-101763.pdf?src-supplier=Digi-Key, ComponentLink4Description=https://datasheet.ciiva.com/11684/e-cl-11684891.pdf?src-supplier=Avnet, ComponentLink4URL=https://datasheet.ciiva.com/11684/e-cl-11684891.pdf?src-supplier=Avnet, ComponentLink5Description=https://datasheet.ciiva.com/16502/e-cl-16502283.pdf?src-supplier=Future+Electronics, ComponentLink5URL=https://datasheet.ciiva.com/16502/e-cl-16502283.pdf?src-supplier=Future+Electronics, Construction=Cylindrical, Diameter=6.3mm, Dissipation Factor=0.16%, Height=7.7mm, Height - Seated (Max)=0.303inch, Impedance=160mR, Lead Free="Lead Free", Length=7.7mm, Life (Hours)=2000Hour, Material=Aluminium, Mount="Surface Mount", Number of Pins=2, Packaging="Tape and Reel", Pricing 1="900=0.22420 (USD)", Radiation Hardening=No, REACH SVHC="No SVHC", Ripple Current (AC)=600mA, RoHS=Yes, RoHS Compliant=Yes, Series=CL, Stock 1=77400, Supplier 1="Arrow Electronics", Supplier Part Number 1=UCL1C221MCL1GS, Termination=SMD/SMT, Voltage Rating (DC)=16V
C24: library part CMP-13271-001056-1, "Cap Ceramic 47nF 50V X7R ±10% Pad SMD 0603 +125°C T/R", Capacitance=47nF, Case Code (Imperial)=0603, Case Code (Metric)=1608, Dielectric=Y5V, Max Operating Temperature=125°C, Min Operating Temperature=-55°C, Package Quantity=4000, Tolerance=10%, Voltage=50V, Case/Package=0603, Contact Plating=Tin, Depth=0.8mm, Height=0.8mm, Lead Free="Lead Free", Length=1.6mm, Material=Ceramic, Mount="Surface Mount", Packaging="Tape and Reel", Radiation Hardening=No, Thickness=0.035inch, Voltage Rating=50V, Voltage Rating (DC)=50V, Width=0.031inch
D1 D2 D3: library part CMP-12791-000011-1, "DIODE GEN PURP 75V 250MA SOD323", Capacitance=4pF, Forward Current=500mA, Manufacturer="Diodes Incorporated", Max Junction Temp=+150°C, Max Repetitive Reverse Voltage=75V, Max Surge Forward Current=0.5A, Package=SOD323, Peak Reverse Current=2.5uA, Temperature="-65°C to +150°C", Temperature Range Low=-65°C, Automotive=No, Category=Diode, ComponentLink2Description=Datasheet, ComponentLink2URL=https://www.diodes.com/assets/Datasheets/ds30096.pdf, Device Class L1="Discrete Semiconductors", Device Class L2=Diodes, Device Class L3="Rectifier Diodes", Digikey Description="DIODE GEN PURP 75V 250MA SOD323", Footprint Url=https://www.diodes.com/assets/Package-Files/SOD323.pdf, Height=1.2mm, Lead Free=Yes, Manufacturer Part Number=1N4448WS-7-F, Mouser Description="1N4448WS Series 4 A 75 V 200 mW Surface Mount Fast Switching Diode - SOD-323", Octopart=https://octopart.com/1n4448ws-7-f-diodes+inc.-55389585, Reverse Voltage=75V, RoHS=TRUE, Standoff Height=0.05mm, Temperature Range High=+150°C
J2: library part "Header 2", "Header, 2-Pin", LatestRevisionDate=17-Jul-2002, LatestRevisionNote="Re-released for DXP Platform.", Publisher="Altium Limited"
J3: library part CMP-1502-01372-3_ALT, Color=Black, Contact Resistance=20mΩ, Current Rating=3A, Flammability Rating="UL94 V-0", Insulation Resistance=1GΩ, Max Operating Temperature=125°C, Min Operating Temperature=-40°C, Operating Supply Voltage=250V, Connector Type="Header, Socket", Contact Gender=Female, Contact Material=Copper, Contact Plating=Gold, Gender=Female, Height=8.5mm, Housing Material=PBT, Insulation=Insulated, Lead Pitch=2.54mm, Length=81.78mm, Mount="Through Hole", NexarPartId=18818174, Number of Contacts=64, Number of Pins=64, Number of Positions=64, Number of Rows=2, Orientation=Vertical, Pitch=2.54mm, REACH SVHC=Unknown, RoHS=Compliant, Row Spacing=2.54mm, Termination="Through Hole", Voltage Rating=250V, Width=81.78mm
MH1 MH2 MH3 MH4: "3mm unplated plus washer keepout"
Q1 Q7 Q8 Q9: library part CMP-07172-000001-1, "JFET N-CH 35V 350MW SOT23", Case/Package=SOT-23, Continuous Drain Current (ID)=5mA, Current Rating=10mA, Drain To Source Resistance=100Ω, Drain to Source Voltage (Vdss)=25V, Gate To Source Voltage=-35V, Gate to Source Voltage (Vgs)=-25V, Input Capacitance=7pF, Manufacturer="ON Semiconductor", Max Junction Temp=+150°C, Max Operating Temperature=150°C, Max Power Dissipation=350mW, Min Operating Temperature=-55°C, Package=318BM, Package Quantity=1, Supplier Part Number 1=MMBF5457CT-ND, Temperature="-55°C to +150°C", Automotive=No, Category=Trans, ComponentLink1Description=https://datasheet.ciiva.com/25625/0900766b810cdc04-25625787.pdf?src-supplier=RSComponents, ComponentLink1URL=https://datasheet.ciiva.com/25625/0900766b810cdc04-25625787.pdf?src-supplier=RSComponents, ComponentLink2Description=Datasheet, ComponentLink2URL=https://www.onsemi.com/pub/Collateral/MMBFJ113-D.PDF, ComponentLink3Description=https://datasheet.ciiva.com/8120/mmbf5459-8120391.pdf?src-supplier=Avnet, ComponentLink3URL=https://datasheet.ciiva.com/8120/mmbf5459-8120391.pdf?src-supplier=Avnet, ComponentLink4Description=https://datasheet.ciiva.com/26026/mmbf5459-26026568.pdf?src-supplier=Avnet+Europe, ComponentLink4URL=https://datasheet.ciiva.com/26026/mmbf5459-26026568.pdf?src-supplier=Avnet+Europe, ComponentLink5Description=https://datasheet.ciiva.com/960/mmbf5457-960906.pdf?src-supplier=Digi-Key, ComponentLink5URL=https://datasheet.ciiva.com/960/mmbf5457-960906.pdf?src-supplier=Digi-Key, ComponentLink6Description=https://datasheet.ciiva.com/960/mmbf5457-960907.pdf?src-supplier=Digi-Key, ComponentLink6URL=https://datasheet.ciiva.com/960/mmbf5457-960907.pdf?src-supplier=Digi-Key, ComponentLink7Description=https://datasheet.ciiva.com/46445/46943-46445739.pdf?src-supplier=Element14, ComponentLink7URL=https://datasheet.ciiva.com/46445/46943-46445739.pdf?src-supplier=Element14, ComponentLink8Description=https://datasheet.ciiva.com/960/mmbf5457-960908.pdf?src-supplier=Digi-Key, ComponentLink8URL=https://datasheet.ciiva.com/960/mmbf5457-960908.pdf?src-supplier=Digi-Key, ComponentLink9Description=https://datasheet.ciiva.com/3304/mmbf5459-3304349.pdf?src-supplier=Avnet, ComponentLink9URL=https://datasheet.ciiva.com/3304/mmbf5459-3304349.pdf?src-supplier=Avnet, Contact Plating=Tin,Matte, Device Class L1="Discrete Semiconductors", Device Class L2=Transistors, Device Class L3=JFETs, Digikey Description="JFET N-CH 35V 350MW SOT23", Element Configuration=Single, Footprint Url=https://www.onsemi.com/pub/Collateral/318BM.PDF, Height=1.2mm, Ipc Land Pattern Name=SOT95P240X120-3, Lead Free=Yes, Length=2.92mm, Manufacturer Part Number=MMBFJ113, Mount="Surface Mount", Mouser Description="JFET N-Channel Switch", Number Of Channels=1, Number Of N Channels=1, Number of Pins=3, Octopart=https://octopart.com/mmbfj113-on+semiconductor-84330253, Packaging="Tape and Reel", Polarity=N-CHANNEL, Power Dissipation=350mW, Pricing 1="1=0.50000, 10=0.39000, 25=0.37280, 100=0.23400, 500=0.21670, 1000=0.14736 (USD)", Radiation Hardening=No, REACH SVHC="No SVHC", RoHS=TRUE, RoHS Compliant=Yes, Rthja Max=357°C/W, Series=MMBF5457, Standoff Height=0mm, Stock 1=13304, Supplier 1=Digi-Key, Temperature Range High=+150°C, Temperature Range Low=-55°C, Voltage Rating (DC)=25V, Weight=0.03g, Width=1.3mm
Q2 Q3 Q4 Q5 Q6: library part CMP-1048-00631-1, "General Purpose Transistor, NPN Silicon, 3-Pin SOT-23, Pb-Free, Tape and Reel", Manufacturer="On Semiconductor", Manufacturer Part Number=MMBT3904,215, Supplier Part Number 1=1727-4044-1-ND, Category=BJTs, ComponentLink1Description="Manufacturer URL", ComponentLink1URL=http://www.onsemi.com/, ComponentLink2Description=Datasheet, ComponentLink2URL=http://www.onsemi.cn/pub_link/Collateral/MMBT3904LT1-D.PDF, ComponentLink3Description="Package Specification", ComponentLink3URL=http://www.onsemi.cn/pub_link/Collateral/318-08.PDF, ComponentLink4Description=http://www.farnell.com/datasheets/2328888.pdf?src-supplier=Farnell, ComponentLink4URL=http://www.farnell.com/datasheets/2328888.pdf?src-supplier=Farnell, ComponentLink5Description=https://assets.nexperia.com/documents/data-sheet/MMBT3904.pdf?src-supplier=Digi-Key, ComponentLink5URL=https://assets.nexperia.com/documents/data-sheet/MMBT3904.pdf?src-supplier=Digi-Key, ComponentLink6Description=http://www.farnell.com/datasheets/2328888.pdf?src-supplier=Newark, ComponentLink6URL=http://www.farnell.com/datasheets/2328888.pdf?src-supplier=Newark, DatasheetVersion="Rev. 12", fT Min (MHz)=300, IC Continuous (A)=0.2, Mounting Technology="Surface Mount", PackageDescription="3-Pin Small Outline Transistor, Body 2.92 x 1.3 mm, Pitch 0.95 mm", PackageReference=SOT-23-3-318-08, PackageVersion="Rev. AP, 11/2009", Packing="Tape and Reel", PartNumber=MMBT3904LT1G, Polarity=NPN, Pricing 1="1=0.10000, 10=0.06500, 25=0.06200, 100=0.03500, 500=0.02750, 1000=0.01910 (USD)", RoHS=TRUE, RoHS Compliant=Yes, Stock 1=165643, Supplier 1=Digi-Key
Q10: library part CMP-1048-00670-1, "General Purpose Transistor, PNP Silicon, 3-Pin SOT-23, Pb-Free, Tape and Reel", Manufacturer="On Semiconductor", ComponentLink1Description="Manufacturer URL", ComponentLink1URL=http://www.onsemi.com/, ComponentLink2Description=Datasheet, ComponentLink2URL=http://www.onsemi.cn/pub_link/Collateral/MMBT3906LT1-D.PDF, ComponentLink3Description="Package Specification", ComponentLink3URL=http://www.onsemi.cn/pub_link/Collateral/318-08.PDF, DatasheetVersion="Rev. 11", fT Min (MHz)=250, IC Continuous (A)=-0.2, Mounting Technology="Surface Mount", PackageDescription="3-Pin Small Outline Transistor, Body 2.92 x 1.3 mm, Pitch 0.95 mm", PackageReference=SOT-23-3-318-08, PackageVersion="Rev. AP, 11/2009", Packing="Tape and Reel", PartNumber=MMBT3906LT1G, Polarity=PNP, RoHS=TRUE
R2 R56: library part CMP-08839-028281-1, "75kΩ ±5% 0.25W 0603 Anti-Surge Chip Resistor AEC-Q200", Case Code (Imperial)=0603, Case Code (Metric)=1608, Max Operating Temperature=155°C, Max Power Dissipation=250mW, Min Operating Temperature=-55°C, Package Quantity=5000, Resistance=75K, Resistor Type="Thick Film", Temperature Coefficient=200ppm/°C, Tolerance=5%, Case/Package=0603, Features="Automotive AEC-Q200", Height=0.022inch, Length=0.063inch, Number of Terminations=2, Packaging="Tape and Reel", RoHS Compliant=Yes, Series=ESR, Width=0.031inch
R3: library part CMP-08839-005369-1, "270kΩ ±5% 0.25W 0603 Anti-Surge Chip Resistor AEC-Q200", Case Code (Imperial)=0603, Case Code (Metric)=1608, Max Operating Temperature=155°C, Max Power Dissipation=250mW, Min Operating Temperature=-55°C, Package Quantity=5000, Resistance=270K, Resistor Type="Thick Film", Temperature Coefficient=200ppm/°C, Tolerance=5%, Case/Package=0603, Features="Automotive AEC-Q200", Height=0.022inch, Length=0.063inch, Number of Terminations=2, Packaging="Cut Tape", RoHS Compliant=Yes, Series=ESR, Width=0.031inch
R4 R6 R9 R12 R15 R17 R26 R32 R52 R61 R62: library part CMP-08839-028975-1, "10kΩ ±5% 0.25W 0603 Anti-Surge Chip Resistor AEC-Q200", Case Code (Imperial)=0603, Case Code (Metric)=1608, Max Operating Temperature=155°C, Max Power Dissipation=250mW, Min Operating Temperature=-55°C, Package Quantity=5000, Resistance=10K, Resistor Type="Thick Film", Temperature Coefficient=200ppm/°C, Tolerance=5%, Case/Package=0603, Height=0.022inch, Lead Free="Lead Free", Length=0.063inch, Mount="Surface Mount", Number of Terminations=2, Packaging="Tape and Reel", Power Rating=250mW, RoHS Compliant=Yes, Series=ESR03, Width=0.031inch
R5 R16 R30: library part CMP-08839-028457-1, "2MΩ ±5% 0.25W 0603 Anti-Surge Chip Resistor AEC-Q200", Case Code (Imperial)=0603, Case Code (Metric)=1608, Max Operating Temperature=155°C, Max Power Dissipation=250mW, Min Operating Temperature=-55°C, Package Quantity=5000, Resistance=2M, Resistor Type="Thick Film", Temperature Coefficient=200ppm/°C, Tolerance=5%, Case/Package=0603, Features="Automotive AEC-Q200", Height=0.022inch, Length=0.063inch, Number of Terminations=2, Packaging="Tape and Reel", RoHS Compliant=Yes, Series=ESR, Width=0.031inch
R7: library part CMP-08839-029018-1, "300kΩ ±5% 0.25W 0603 Anti-Surge Chip Resistor AEC-Q200", Case Code (Imperial)=0603, Case Code (Metric)=1608, Max Operating Temperature=155°C, Max Power Dissipation=250mW, Min Operating Temperature=-55°C, Package Quantity=5000, Resistance=300K, Resistor Type="Thick Film", Temperature Coefficient=200ppm/°C, Tolerance=5%, Case/Package=0603, Features="Automotive AEC-Q200", Height=0.022inch, Length=0.063inch, Number of Terminations=2, Packaging="Tape and Reel", Series=ESR, Width=0.031inch
R8 R46: library part CMP-08839-029147-1, "1MΩ ±5% 0.25W 0603 Anti-Surge Chip Resistor AEC-Q200", Case Code (Imperial)=0603, Case Code (Metric)=1608, Max Operating Temperature=155°C, Max Power Dissipation=250mW, Min Operating Temperature=-55°C, Package Quantity=1, Resistance=1M, Resistor Type="Thick Film", Temperature Coefficient=200ppm/°C, Tolerance=5%, Case/Package=0603, Features="Automotive AEC-Q200", Height=0.022inch, Length=0.063inch, Number of Terminations=2, Packaging="Cut Tape", RoHS Compliant=Yes, Series=ESR, Width=0.031inch
R10 R19 R41: library part CMP-08839-028761-1, "470kΩ ±5% 0.25W 0603 Anti-Surge Chip Resistor AEC-Q200", Case Code (Imperial)=0603, Case Code (Metric)=1608, Max Operating Temperature=155°C, Max Power Dissipation=250mW, Min Operating Temperature=-55°C, Package Quantity=5000, Resistance=470K, Resistor Type="Thick Film", Temperature Coefficient=200ppm/°C, Tolerance=5%, Case/Package=0603, Features="Automotive AEC-Q200", Height=0.022inch, Length=0.063inch, Number of Terminations=2, Packaging="Cut Tape", RoHS Compliant=Yes, Series=ESR, Width=0.031inch
R11: library part CMP-08839-028910-1, "2kΩ ±5% 0.25W 0603 Anti-Surge Chip Resistor AEC-Q200", Case Code (Imperial)=0603, Case Code (Metric)=1608, Max Operating Temperature=155°C, Max Power Dissipation=250mW, Min Operating Temperature=-55°C, Package Quantity=1, Resistance=2K, Resistor Type="Thick Film", Temperature Coefficient=200ppm/°C, Tolerance=5%, Case/Package=0603, Features="Automotive AEC-Q200", Height=0.022inch, Height - Seated (Max)=0.022inch, Length=0.063inch, Number of Terminations=2, Packaging="Tape and Reel", RoHS Compliant=Yes, Series=ESR, Width=0.032inch
R14 R24 R25 R31 R44 R45 R47 R55 R58 R59 R60 R67: library part CMP-08839-029521-1, "100kΩ ±5% 0.25W 0603 Anti-Surge Chip Resistor AEC-Q200", Case Code (Imperial)=0603, Case Code (Metric)=1608, Max Operating Temperature=155°C, Max Power Dissipation=250mW, Min Operating Temperature=-55°C, Package Quantity=1, Power Rating=200mW, Resistance=100K, Resistor Type="Thick Film", Temperature Coefficient=200ppm/°C, Tolerance=5%, Case/Package=0603, Features="Automotive AEC-Q200", Height=0.022inch, Lead Free="Lead Free", Length=0.063inch, Number of Terminations=2, Packaging="Cut Tape", RoHS Compliant=Yes, Series=ESR, Size Code=0603, Width=0.031inch
R18: library part CMP-08839-029360-1, "15kΩ ±5% 0.25W 0603 Anti-Surge Chip Resistor AEC-Q200", Case Code (Imperial)=0603, Case Code (Metric)=1608, Max Operating Temperature=155°C, Max Power Dissipation=250mW, Min Operating Temperature=-55°C, Package Quantity=1, Resistance=15K, Resistor Type="Thick Film", Temperature Coefficient=200ppm/°C, Tolerance=5%, Case/Package=0603, Features="Automotive AEC-Q200", Height=0.022inch, Length=0.063inch, Number of Terminations=2, Packaging="Tape and Reel", RoHS Compliant=Yes, Series=ESR, Width=0.031inch